# Altium PCB AccShelf1.PcbDoc
Units mm, origin at the board's own origin, x right, y up, seen from the top; angles counter-clockwise.
Board outline 140 x 61 mm, 2 copper layers (Top Layer, Bottom Layer), stack 1.711 mm thick; 32 components, 44 nets, 111 pads, 0 vias.
Unrouted connection lines stored in the file: 64.
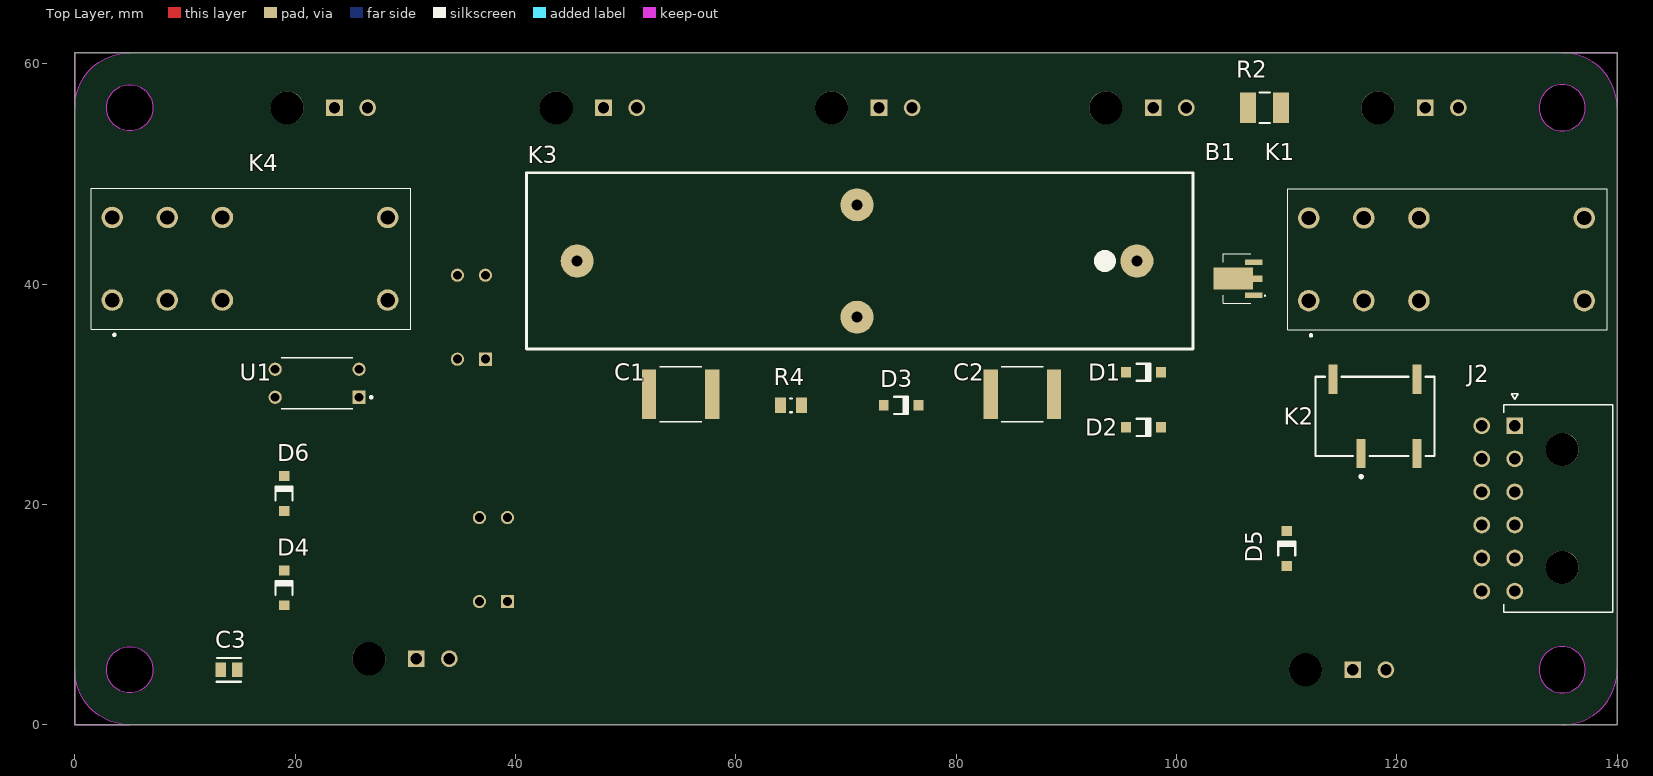
[diagram p0: Top Layer view]
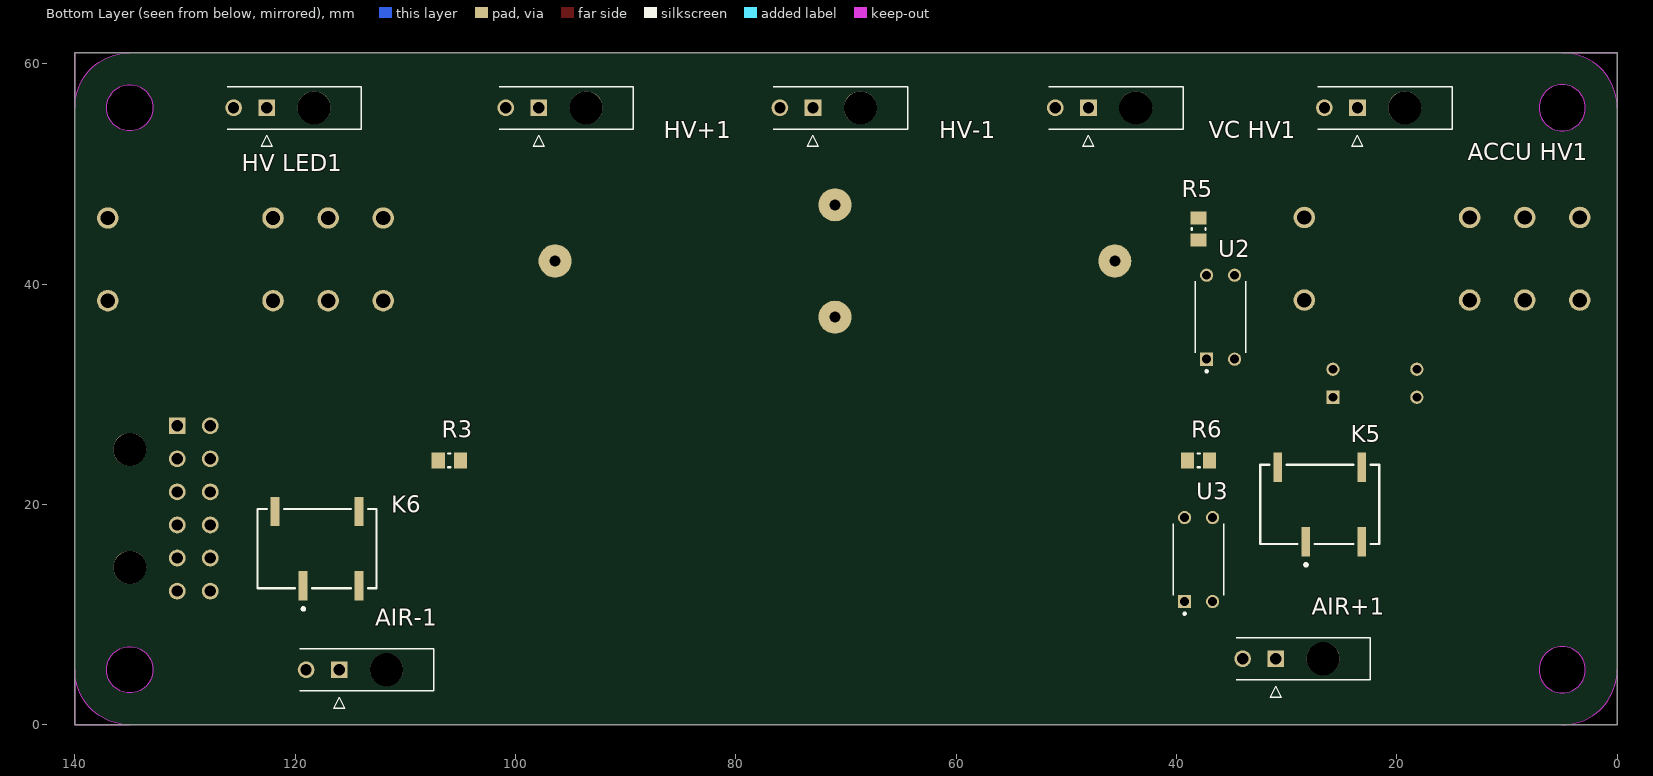
[diagram p1: Bottom Layer view, seen from below]

## Layer stack, top to bottom
Top Solder: solder mask 0.0102, Solder Resist, Dk 3.5
Top Layer: signal copper 0.3556
Dielectric 1: dielectric 1, FR-4, Dk 4.8
Bottom Layer: signal copper 0.3556
Bottom Solder: solder mask 0.0102, Solder Resist, Dk 3.5

## Board outline
0,61 140,61 140,0 0,0
cut-out: 0,0 5,0 cw(c5,5) 0,5
cut-out: 0,56 cw(c5,56) 5,61 0,61
cut-out: 135,0 ccw(c135,5) 140,5 140,0
cut-out: 135,61 140,61 140,56 ccw(c135,56)
cut-out: 132.9,56 ccw(c135,56) 135,53.9 ccw(c135,56) 137.1,56 ccw(c135,56) 135,58.1 ccw(c135,56)
cut-out: 132.9,5 ccw(c135,5) 135,2.9 ccw(c135,5) 137.1,5 ccw(c135,5) 135,7.1 ccw(c135,5)
cut-out: 5,2.9 cw(c5,5) 2.9,5 cw(c5,5) 5,7.1 cw(c5,5) 7.1,5 cw(c5,5)
cut-out: 5,53.9 cw(c5,56) 2.9,56 cw(c5,56) 5,58.1 cw(c5,56) 7.1,56 cw(c5,56)

## Design rules (kind name [scope] priority, off if disabled: settings)
Clearance [All] p1: gap=4 ignorepadtopadclearanceinfootprint=FALSE
PolygonConnect [All] p1: connectstyle=Relief reliefconductorwidth=0.254 reliefentries=4 polygonreliefangle="90 Angle" airgapwidth=0.254
RoutingVias [All] p1: holewidth=0.008 width=0.015 viastyle="Through Hole" minholewidth=0.008 minwidth=0.015 maxholewidth=0.008 maxwidth=0.015
SolderMaskExpansion [All] p1: expansion=0.102 istentingtop=FALSE
Width [All] p1: maxlimit=0.762 minlimit=0.254 preferedwidth=0.762
30 further rules are at their usual default settings.

## Components (designator, comment, footprint, x,y, rotation, side; value= is the part's Value field where it differs from the comment)
"ACCU HV1" "2125280200" "2 Pin Dual In-line Connector" 23.581,56 r90 bottom
AIR+1 "2125280200" "2 Pin Dual In-line Connector" 31,6 r90 bottom
AIR-1 "2125280200" "2 Pin Dual In-line Connector" 116,5 r90 bottom
B1 "NCP785AH120T1G" "IC REG LINEAR 12V 10MA SOT89-3 - duplicate" 106.725,40.5 r90 top
C1 "1uf Special Cap" "1uf Special Cap" 55,30 r0 top
C2 "1uf Special Cap" "1uf Special Cap" 86,30 r0 top
C3 "C0805C106K8PACTU" FP-C0805C-DG-MFG 14,5 r0 top value=10uF
D1 "1N4148W-7-F" DIOD-SOD123-2_V 97,32 r0 top
D2 "1N4148W-7-F" DIOD-SOD123-2_V 97,27 r0 top
D3 "1N4148W-7-F" DIOD-SOD123-2_V 75,29 r0 top
D4 "1N4148W-7-F" DIOD-SOD123-2_V 19,12.425 r90 top
D5 "1N4148W-7-F" DIOD-SOD123-2_V 110,16 r90 top
D6 "1N4148W-7-F" DIOD-SOD123-2_V 19,21 r90 top
"HV LED1" "2125280200" "2 Pin Dual In-line Connector" 122.581,56 r90 bottom
HV+1 "2125280200" "2 Pin Dual In-line Connector" 97.881,56 r90 bottom
HV-1 "2125280200" "2 Pin Dual In-line Connector" 73,56 r90 bottom
J2 "2125281200" "12 Pin Dual Inline Connector" 130.7,27.14 r90 top
K1 "General 12V Relay" "General 12V Relay" 124.6,41.95 r180 top
K2 "G6L-1F-DC5" FP-G6L-1F-DC5-MFG 118,28 r0 top
K3 "REED RELAY" ReedRelay 71,42.1 r180 top
K4 "General 12V Relay" "General 12V Relay" 16,42 r180 top
K5 "G6L-1F-DC5" FP-G6L-1F-DC5-MFG 27,20 r180 bottom
K6 "G6L-1F-DC5" FP-G6L-1F-DC5-MFG 118,16 r180 bottom
R2 "KTR25JZPF5101" FP-KTR25-IPC_A 108,56 r0 top
R3 "RC0805FR-074K7L" YAGO-RC0805_M 106,24 r180 bottom
R4 "CRCW08052K20FKEA" FP-CRCW0805-e3-IPC_B 65,29 r0 top
R5 "RC0805FR-074K7L" YAGO-RC0805_M 38,45 r90 bottom
R6 "RC0805FR-074K7L" YAGO-RC0805_M 38,24 r180 bottom
U1 "FOD852" FOD852 22,31 r180 top
U2 "FOD852" FOD852 36,37 r90 bottom
U3 "FOD852" FOD852 38,15 r90 bottom
"VC HV1" "2125280200" "2 Pin Dual In-line Connector" 48,56 r90 bottom

## Footprints (in the part's own frame and the unit in brackets; to place one, negate y for a bottom-side part, rotate by r counter-clockwise, add the part's x,y. Pads: shape width x height; smd on the part's side, far side on the other; paste and mask are expansions set on the pad)
"1uf Special Cap" [mm]
  rect 1.3x4.5 smd: 1(-2.875,0) 2(2.875,0)
  silkscreen extent -1.91,-2.5 1.91,2.5, body extent -2.85,-2.54 2.85,2.46, height 2.81
"2 Pin Dual In-line Connector" [mm]
  rect 1.52x1.52 / inner round 1.52 / far side rect 1.52x1.52 hole 1.02 mask+0.076: 1(0,0)
  round 1.52 hole 1.02 mask+0.076: 2(0,3)
  round 3 hole 3 unplated mask+0.076: 3(0,-4.3)
  silkscreen extent -3.5,-8.59 1.92,3.59, body extent -1.94,-8.76 1.91,3.42, height 8.81
"12 Pin Dual Inline Connector" [mm]
  rect 1.52x1.52 / inner round 1.52 / far side rect 1.52x1.52 hole 1.02 mask+0.076: 1(0,0)
  round 1.52 hole 1.02 mask+0.076: 2(-3,0) 3(-6,0) 4(-9,0) 5(-12,0) 6(-15,0) 7(0,3) 8(-3,3) 9(-6,3) 10(-9,3) 11(-12,3) 12(-15,3)
  round 3 hole 3 unplated mask+0.076: ""(-12.84,-4.3) ""(-2.14,-4.3)
  silkscreen extent -16.93,-8.9 2.9,1.01, body extent -16.92,-8.89 1.93,3.29, height 8.81
DIOD-SOD123-2_V [mm] "SOD123, 2-Leads, Body 2.7x1.55mm, Height 1.45mm"
  rect 0.9x0.95 smd: 1(-1.575,0) 2(1.575,0)
  silkscreen extent -0.64,-0.82 0.64,0.77, body extent -1.35,-0.77 1.35,0.77, height 1.45
FOD852 [mm]
  rect 1.2x1.2 hole 0.8: 1(-3.81,1.27)
  round 1.2 hole 0.8: 2(-3.81,-1.27) 3(3.81,-1.27) 4(3.81,1.27)
  silkscreen extent -5.01,-2.3 3.25,2.3, body extent -3.94,-2.17 3.94,2.43, height 4.4
FP-C0805C-DG-MFG [mm]
  rect 0.95x1.35 smd paste+0 mask+0: 1(-0.75,0) 2(0.75,0)
  silkscreen extent -1.11,-1.08 1.1,1.07, body extent -1.4,-0.85 1.4,0.85, height 0.25
FP-CRCW0805-e3-IPC_B [mm]
  rect 1.007x1.408 smd paste+0 mask+0: 1(-0.951,0) 2(0.951,0)
  silkscreen extent -0.07,-0.63 0.07,0.63, body extent -1.7,-0.95 1.7,0.95, height 0.25
FP-G6L-1F-DC5-MFG [mm]
  rect 0.8x2.66 smd paste+0 mask+0: 2(-1.27,-3.37) 4(3.81,-3.37) 5(3.81,3.37) 8(-3.81,3.37)
  silkscreen extent -5.4,-5.6 5.4,3.6, body extent -5.5,-4.8 5.5,4.8, height 0.25
FP-KTR25-IPC_A [mm]
  rect 1.456x2.758 smd paste+0 mask+0: 1(-1.501,0) 2(1.501,0)
  silkscreen extent -0.47,-1.38 0.47,1.38, body extent -2.73,-1.88 2.73,1.88, height 0.25
"General 12V Relay" [mm]
  round 1.95 hole 1.3: 1(12.6,3.45) 2(7.6,3.45) 3(2.6,3.45) 4(-12.4,3.45) 5(-12.4,-4.05) 6(2.6,-4.05) 7(7.6,-4.05) 8(12.6,-4.05)
  silkscreen extent -14.5,-6.7 14.5,6.7, body extent -10,-3.38 10,3.38, height 5.8
"IC REG LINEAR 12V 10MA SOT89-3 - duplicate" [mm]
  rect 0.5x1.57 smd: 1(-1.5,-0.275) 3(1.5,-0.275)
  rect 0.58x0.86 smd: 2(0,-0.63)
  rect 2x3.59 smd: 4(0,1.595)
  silkscreen extent -2.25,-1.35 2.25,2.5, body extent -10,-3.38 10,3.38, height 5.8
ReedRelay [mm]
  round 3 hole 1: 1(-25.4,0) 2(25.4,0) 3(0,5.1) 4(0,-5.1)
  silkscreen extent -30.5,-8 30,8, body extent -30,-7.9 30,7.9, height 18.5
YAGO-RC0805_M [mm] "Chip Resistor, 2-Leads, Body 2.00x1.25mm, IPC Low Density"
  rect 1.2x1.45 smd: 1(-1,0) 2(1,0)
  silkscreen extent -0.1,-0.63 0.1,0.63, body extent -1,-0.62 1,0.63, height 0.6

## Part data
"ACCU HV1" AIR+1 AIR-1 "HV LED1" HV+1 HV-1 J2 "VC HV1": Package=None, Availability=Unavailable, MF="{'manufacturer': u'Molex'}", Price=None
  "ACCU HV1" AIR+1 AIR-1 "HV LED1" HV+1 HV-1 "VC HV1": MP=2125280200
  J2: MP=2125281200
B1: library part "IC REG LINEAR 12V 10MA SOT89-3", "Linear Voltage Regulator, 10 mA, 450 V, Ultra-Low Iq, High PSRR", Case/Package=SOT-89, Manufacturer="ON Semiconductor", Manufacturer_Name=onsemi, Max Input Voltage (DC)=450V, Max Operating Temperature=85°C, Min Current Limit=10.5mA, Min Input Voltage=85V, Min Input Voltage (DC)=55V, Min Operating Temperature=-40°C, Mouser Part Number=863-NCP785AH120T1G, Nominal Output Voltage=12V, Output Current=10mA, Power Supply Rejection Ratio (PSRR)=70dB, Quiescent Current=22uA, Reference Voltage=1.25V, Supplier Part Number=71AC3125, Accuracy=5%, Arrow Part Number=NCP785AH120T1G, Arrow Price/Stock=https://www.arrow.com/en/products/ncp785ah120t1g/on-semiconductor?region=nac, Category="Voltage Regulators - Linear", ComponentLink1Description=http://www.farnell.com/datasheets/1948370.pdf?src-supplier=Farnell, ComponentLink1URL=http://www.farnell.com/datasheets/1948370.pdf?src-supplier=Farnell, ComponentLink2Description=http://uk.rs-online.com/webdocs/141c/0900766b8141c022.pdf?src-supplier=Rs, ComponentLink2URL=http://uk.rs-online.com/webdocs/141c/0900766b8141c022.pdf?src-supplier=Rs, ComponentLink3Description=http://www.onsemi.com/pub/Collateral/NCP785A-D.PDF?src-supplier=Avnet, ComponentLink3URL=http://www.onsemi.com/pub/Collateral/NCP785A-D.PDF?src-supplier=Avnet, ComponentLink4Description=http://www.farnell.com/datasheets/1948370.pdf?src-supplier=Element14, ComponentLink4URL=http://www.farnell.com/datasheets/1948370.pdf?src-supplier=Element14, ComponentLink5Description=http://www.onsemi.com/pub/Collateral/NCP785A-D.PDF?src-supplier=Digi-Key, ComponentLink5URL=http://www.onsemi.com/pub/Collateral/NCP785A-D.PDF?src-supplier=Digi-Key, Datasheet Link=http://www.onsemi.com/pub/Collateral/NCP785A-D.PDF, Height=1.6mm, Lead Free="Lead Free", Length=4.6mm, Manufacturer Part Number=NCP785AH120T1G, Manufacturer_Part_Number=NCP785AH120T1G, Max Supply Voltage=450V, Mounting Technology="Surface Mount", Mouser Price/Stock=https://www.mouser.co.uk/ProductDetail/onsemi/NCP785AH120T1G?qs=16s%2F1Hm5%252BncJGxtPzEnjAw%3D%3D, Number of Outputs=1, Number of Regulators=1, Output Configuration=Positive, Output Type=Fixed, Output Voltage=12V, Packaging="Cut Tape", Pins=3, Polarity=Positive, Pricing="1=1.18000, 10=1.06000, 25=1.01000, 50=0.91800, 100=0.82600, 250=0.77300, 500=0.68300, 1000=0.53900 (USD)", Reach SVHC Compliant=Yes, RoHS=Yes, RoHS Compliant=Yes, Series=-, Stock=616, Supplier=Newark, Width=2.6mm
C1 C2: "Multilayer Ceramic Capacitors 2220 450V X7R 105 10% automotive", Case Code (Imperial)=2220, Case Code (Metric)=5750, Dielectric=X7T, Manufacturer=TDK, Manufacturer Part Number=CGA9P4X7T2W105K250KA, Max Operating Temperature=125°C, Min Operating Temperature=-55°C, Package=None, Package Quantity=1, Ratings=AEC-Q200, Resistor Type=Ceramic, Tolerance=10%, Voltage Rating=450V, Availability=Unavailable, Case/Package=2220, Category="Ceramic Capacitors", ComponentLink1Description=https://datasheet.ciiva.com/24216/mlcc-automotive-midvoltage-en-355485-24216199.pdf?src-supplier=Mouser, ComponentLink1URL=https://datasheet.ciiva.com/24216/mlcc-automotive-midvoltage-en-355485-24216199.pdf?src-supplier=Mouser, Depth=5mm, Height=2.5mm, Length=5.7mm, MF="{'manufacturer': u'TDK'}", Mounting Technology="Surface Mount", MP=CGA9P4X7T2W105K250KA, Packaging="Tape and Reel", Price=None, Pricing="500=1.11030, 1000=1.02000, 2500=0.99730, 5000=0.97400, 10000=0.95610 (USD)", RoHS=Yes, RoHS Compliant=Yes, Series=CGA, Stock=1500, Supplier="Arrow Electronics", Supplier Part Number=CGA9P4X7T2W105K250KA, Termination=SMD/SMT, Thickness=0.098inch, Voltage Rating (DC)=450V, Weight=0.016932oz, Width=0.197inch
C3: library part CMP-2007-03243-2, "CAP CER 10UF 10V X5R 0805", 3DS Part Number=220-00001, Capacitance=10uF, Manufacturer=Kemet, Package=C0805C-DG, Temperature="-55°C to +85°C", Temperature Characteristic=X5R, Temperature Coefficient=15%, Temperature Range High=+85°C, Temperature Range Low=-55°C, Tolerance=10%, Voltage=10V, Automotive=No, Category=Cap, ComponentLink2Description=Datasheet, ComponentLink2URL=https://content.kemet.com/datasheets/KEM_C1006_X5R_SMD.pdf, Device Class L1="Passive Components", Device Class L2=Capacitors, Device Class L3="Ceramic Capacitors", Digikey Description="CAP CER 10UF 10V X5R 0805", Height=1.4mm, Ipc Land Pattern Name=CAPC200125X125, Lead Free=Yes, Manufacturer Part Number=C0805C106K8PACTU, Material=Ceramic, Mouser Description="CAP CER 10UF 10V X5R 0805", Octopart=https://octopart.com/c0805c106k8pactu-kemet-98697, RoHS=TRUE, Voltage Rating=10V
D1 D2 D3 D4 D5 D6: library part CMP-2000-04932-2, "Fast Switching Diode, 100 V, 0.15 A, -65 to 150 degC, 2-Pin?SOD123, RoHS, Tape and Reel", If - Forward Current=0.15A, Ir - Reverse Current=1uA, Manufacturer=DiodesIncorporated, Max Surge Current=2A, Maximum Operating Temperature=+150C, Minimum Operating Temperature=-65C, Operating Temperature Range=-65Cto+150C, Package / Case=SOD-123, Package Reference=SOD123-2, Peak Reverse Voltage=100V, Vf - Forward Voltage=1.25V, Brand=DiodesIncorporated, Configuration=Single, Datasheet URL=http://www.farnell.com/datasheets/1915529.pdf, Datasheet Version="Rev. 24-2, 10/2013", Factory Pack Quantity=3000, Height=1.25mm, Length=2.85mm, Manufacturer URL=http://www.diodes.com/, Mounting Style=SMD/SMT, Package URL=http://www.diodes.com/datasheets/ds18004.pdf, Packaging=Reel, Product=SwitchingDiodes, Product Category=Diodes-GeneralPurpose,Power,Switching, Recovery Time=4ns, RoHS=True, Series=1N4148, Type=SwitchingDiode, Unit Weight=0.000353oz, Width=1.7mm
K1 K4: "FTR-F1AA012V", LatestRevisionDate=17-Jul-2002, LatestRevisionNote="Re-released for DXP Platform.", PackageReference=MODULE6, Published=24-Mar-1999, Publisher="Altium Limited"
K2 K5 K6: library part CMP-08823-000020-1, "RELAY TELECOM SPST 1A 5VDC", Ambient Temperature Range High=+70°C, Ambient Temperature Range Low=-40°C, Coil Current=36mA, Coil Power=180mW, Coil Resistance=139Ω, Coil Voltage=5V, Current Rating=1A, Manufacturer=Omron, Temperature="-40°C to +70°C", Automotive=No, Category=Relay, Coil Type=Non-Latching, ComponentLink2Description=Datasheet, ComponentLink2URL=https://media.digikey.com/pdf/Data%20Sheets/Omron%20PDFs/G6L.pdf, Device Class L1=Electromechanical, Device Class L2=Relays, Device Class L3="Signal Relays", Digikey Description="RELAY TELECOM SPST 1A 5VDC", Height=4.4mm, Lead Free=Yes, Manufacturer Part Number=G6L-1F-DC5, Mouser Description="Low Signal Relays - PCB LO PROF SPST 5VDC", Number of Contacts=1, Octopart=https://octopart.com/g6l-1f+dc5-omron-18903080, Package=G6L-1F-DC5, RoHS=TRUE, Standoff Height=0.4mm, Temperature Range High=+70°C, Temperature Range Low=-40°C, Throw Configuration=SPST-NO
K3: library part Relay-SPST, "Single-Pole Single-Throw Relay", LatestRevisionDate=17-Jul-2002, LatestRevisionNote="Re-released for DXP Platform.", PackageReference=MODULE4, Published=24-Mar-1999, Publisher="Altium Limited"
R2: library part CMP-08839-003898-1, "Res Thick Film 1210 5.1kΩ 1% 0.1W ±100ppm/°C Automotive Embossed T/R", Case Code (Imperial)=1210, Case Code (Metric)=3225, Max Operating Temperature=155°C, Max Power Dissipation=333mW, Min Operating Temperature=-55°C, Package Quantity=4000, Resistance=5.1kR, Resistor Type="Thick Film", Temperature Coefficient=100ppm/°C, Tolerance=1%, Case/Package=1210, Features="Automotive AEC-Q200", Height=0.028inch, Length=0.126inch, Number of Terminations=2, Packaging="Tape and Reel", RoHS Compliant=Yes, Series=KTR, Width=0.098inch
R3 R5 R6: library part CMP-1568-00001-1, "General Puprose Chip Resistor, 4700 Ohm +/- 1%, 0.125 W, -55 to 155 degC, 2-Pin SMD, RoHS, Tape and Reel", Power="0.125 W", Resistance="4700 Ohm", Temperature Max="155 degC", Temperature Min="-55 degC", Tolerance="+/- 1%", ComponentLink1Description="Manufacturer URL", ComponentLink1URL=http://www.yageo.com/NewPortal/_en/index.jsp, ComponentLink2Description=Datasheet, ComponentLink2URL=http://www.yageo.com/documents/recent/PYu-RC_Group_51_RoHS_L-3.pdf, DatasheetVersion="Rev. 3", Mounting Technology="Surface Mount", PackageDescription="2-Pin Surface Mount Device, Body 2 x 1.25 mm", Packing="Tape and Reel", PartNumber=RC0805FR-074K7L, RoHS=TRUE
R4: library part CMP-2001-03760-2, "RES Thick Film, 2.2kΩ, 1%, 0.125W, 100ppm/°C, 0805", Case Code (Imperial)=0805, Case Code (Metric)=2012, Max Operating Temperature=155°C, Max Power Dissipation=125mW, Min Operating Temperature=-55°C, Package Quantity=10, Resistance=2.2kR, Temperature Coefficient=100ppm/°C, Tolerance=1%, Voltage Rating=150V, Case/Package=0805, Composition="Thick Film", Contact Plating=Tin, Depth=1.25mm, Features="Automotive AEC-Q200", Height=0.45mm, Lead Free="Lead Free", Length=2mm, Military Standard=Not, Number of Terminations=2, Packaging="Tape and Reel", Power Rating=125mW, Radiation Hardening=No, Termination=SMD/SMT, Voltage Rating (DC)=150V, Weight=0.000194oz, Width=1.25mm
U1 U2 U3: "4-Pin Phototransistor Optocoupler", DatasheetVersion=Nov-2003, LatestRevisionDate=04-Mar-2005, LatestRevisionNote="Sch pins 3 & 4 Swapped.", PackageReference=DIP-4, Published=24-Mar-1999, Publisher="Altium Limited"

## Nets (pads, with @x,y where several pads share a name; then routed paths per layer and width w, separated by ;. In a path a pad name is that pad's centre, name@x,y a point inside that pad or via, vN(x,y) a via of type N, cw(c..) or ccw(c..) an arc to the next point about the centre after c; other vN are vias at no path point)
"+5 V": 
+5V: J2.5
"+12 V": J2.12 R6.1 U1.4 U3.4
ACCU_HV: "ACCU HV1.1" "ACCU HV1.2" K3.1
AIR+: AIR+1.1 K6.2
BMS_OK: J2.8 U3.2
CANH: 
CANL: 
GND: AIR+1.2 AIR-1.2 C3.2 D1.1 D2.1 D3.1 D4.1 D5.1 D6.1 J2.1 K1.5 K2.5 K3.3 K5.5 K6.5 R4.2 U1.2 U2.2
HV+: B1.1 C1.2 HV+1.1 HV+1.2
HV-: B1.2 B1.4 C1.1 HV-1.1 HV-1.2
IMD_OK: C3.1 J2.7 R3.1 R4.1
LATCH_RESET: D2.2 D5.2 J2.10 K2.8 K5.8
MC_MC: D6.2 J2.9 K6.8
MC_PC: J2.2 R5.2
"MUX 1st Bit": 
"MUX 2nd Bit": 
"MUX 3rd Bit": 
"MUX 4th Bit": 
NetB1_3: B1.3 C2.2 R2.1
NetC2_1: "HV LED1.2" C2.1
NetD1_2: D1.2 K1.1 K1.4 K2.4
NetD3_2: D3.2 K3.4 U2.3
NetD4_2: D4.2 K4.8 K5.4
"NetHV LED1_1": "HV LED1.1" R2.2
NetJ1_8: 
NetJ?_1: 
NetJ?_2: 
NetJ?_3: 
NetJ?_4: 
NetJ?_5: 
NetJ?_6: 
NetK1_2: K1.2 K2.2 U1.3
NetK4_7: K4.7 K5.2 U3.3
NetR3_2: R3.2 U1.1
NetR5_1: R5.1 U2.1
NetR6_2: R6.2 U3.1
RX: 
SSC: K1.8
SSC_END: AIR-1.1 J2.11 K6.4 U2.4
SSC_IN: J2.6 K1.7
SSC_OUT: J2.3
TX: 
VC_HV: "VC HV1.1" "VC HV1.2" K3.2
pads on no net: "ACCU HV1.3" "HV LED1.3" "VC HV1.3" AIR+1.3 AIR-1.3 HV+1.3 HV-1.3 J2. J2.4 K1.3 K1.6 K4.1 K4.2 K4.3 K4.4 K4.5 K4.6